# EAGLE board Schema (EAGLE 9.6.2)
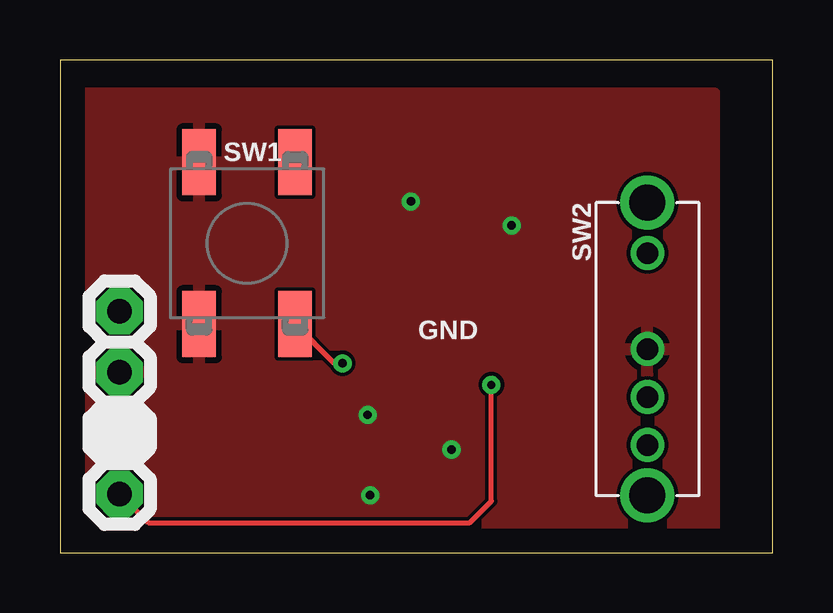
[diagram p0: board, top side]
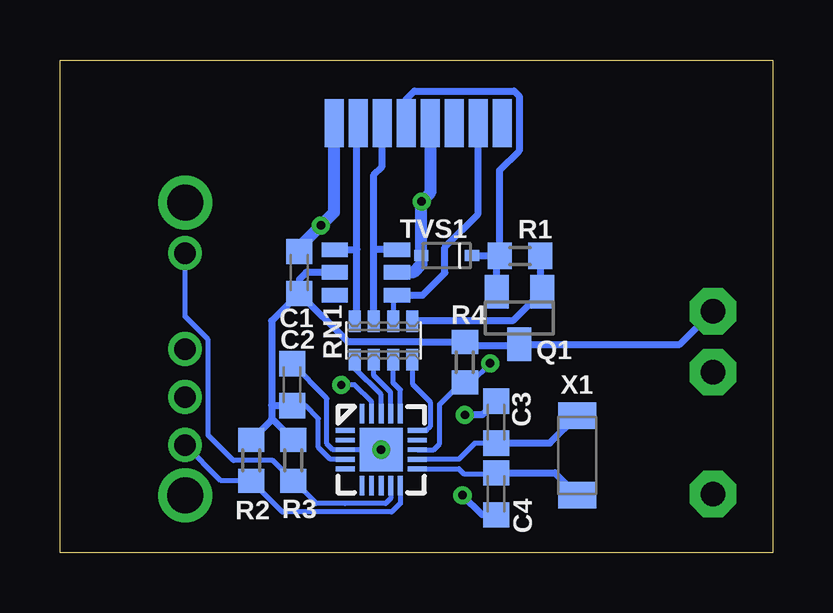
[diagram p1: board, bottom side, seen from below]

Size 29.69 x 20.55 mm. Coordinates in mm from the lower left corner, seen from the top.
Outline: 0,0 29.69,0 29.69,20.55 0,20.55 0,0
Copper layers (1*16): Top 0.035mm / dielectric 1.5mm / Bottom 0.035mm
Design rules "default *": minimum track width 6mil, minimum drill 0.35mm, track to track 6mil, track to pad 6mil, pad to pad 6mil, via to via 6mil, smd to smd 6mil, copper to edge 40mil, drill to drill 0mil, minimum pad ring 10mil, minimum via ring 8mil, stop-mask expansion 4mil, vias tented up to drill 15mil, thermal gap 10mil

## Footprints (pad centres in the part's own frame; a part is rotated, then mirrored left to right if it is on the bottom)
C0603K = smd 1.05 x 1.08: 1 -0.875,0; 2 0.875,0
SOT23 = smd 1 x 1.4: 1 -0.95,-1.1; 2 0.95,-1.1; 3 0,1.1
R0603 = smd 1 x 1.1: 1 -0.85,0; 2 0.85,0
CTS742C083 = smd 0.5 x 0.9: 1 -1.2,-0.8; 2 -0.4,-0.8; 3 0.4,-0.8; 4 1.2,-0.8; 5 1.2,0.8; 6 0.4,0.8; 7 -0.4,0.8; 8 -1.2,0.8
SWITCH-DTS = smd 2.75 x 1.4: T1 -3.375,2; T2 3.375,2; T3 -3.375,-2; T4 3.375,-2
OS103011MS8QP1 = drill 0.9: 1 -4,0; 2 0,0; 3 2,0; 4 4,0 | drill 1.5: A -6.1,0; B 6.1,0
SOD323 = smd 0.59 x 0.45: ANODE 1.055,0; CATHODE -1.055,0
SOD-23-6 = smd 1.1 x 0.6: 1 -1.3,0.95; 2 -1.3,0; 3 -1.3,-0.95; 4 1.3,-0.95; 5 1.3,0; 6 1.3,0.95
ATTINY1616-20VQFN = smd 0.8 x 0.2: 1 -1.5,0.8; 2 -1.5,0.4; 3 -1.5,0; 4 -1.5,-0.4; 5 -1.5,-0.8; 11 1.5,-0.8; 12 1.5,-0.4; 13 1.5,0; 14 1.5,0.4; 15 1.5,0.8 | smd 0.2 x 0.8: 6 -0.8,-1.5; 7 -0.4,-1.5; 8 0,-1.5; 9 0.4,-1.5; 10 0.8,-1.5; 16 0.8,1.5; 17 0.4,1.5; 18 0,1.5; 19 -0.4,1.5; 20 -0.8,1.5 | smd 1.8 x 1.8: TH 0,0
VEX-CONNECT = smd 0.8 x 2: COMP -0.5,0; CONNECT 2.5,0; ENABLE -1.5,0; GROUND.1 -3.5,0; GROUND.2 0.5,0; MODE -2.5,0; NC.1 1.5,0; NC.2 3.5,0
PROG = drill 1.016 pad 1.93 octagon: P$1 -1.27,0; P$2 -3.81,0; P$3 3.81,0
1206-UNI = smd 1.1 x 1.6: 1 -1.65,0; 2 1.65,0

## Placement (x,y rotation side)
C1  10uf  [C0603K]  19.72,11.69 90 bottom
C2  100nf  [C0603K]  20.02,7.01 90 bottom
C3  12pf  [C0603K]  11.52,5.45 90 bottom
C4  12pf  [C0603K]  11.52,2.46 270 bottom
Q1  BSS84  [SOT23]  10.55,9.79 180 bottom
R1  1M  [R0603]  10.52,12.38 0 bottom
R2  1M  [R0603]  21.72,3.85 90 bottom
R3  1M  [R0603]  19.97,3.85 90 bottom
R4  1M  [R0603]  12.82,7.95 90 bottom
RN1  220R  [CTS742C083]  16.21,8.85 180 bottom
SW1  SWITCH-DSTL61R-B  [SWITCH-DTS]  7.79,12.91 270 top
SW2  SWITCH-SP3T  [OS103011MS8QP1]  24.48,8.49 270 top
TVS1  D1213A-01WS-7  [SOD323]  13.58,12.39 180 bottom
TVS2  TPD4E001DBVR  [SOD-23-6]  16.94,11.69 180 bottom
U$1  ATTINY1616-MNR  [ATTINY1616-20VQFN]  16.31,4.3 0 bottom
U$4  VEX-CONNECT  [VEX-CONNECT]  14.77,17.92 0 bottom
U$5  PROG  [PROG]  2.48,6.26 270 top
X1  XTAL2-3X1.5  [1206-UNI]  8.14,4.06 270 bottom

## Library data of the parts
C1 = rcl; LCSC_PART: C19702; SPICEPREFIX: C
C2 = rcl; LCSC_PART: C14663; SPICEPREFIX: C
C3 C4 = rcl; LCSC_PART: C38523; SPICEPREFIX: C
Q1 = transistor-small-signal; LCSC_PART: C114481
R1-R4 = rcl; LCSC_PART: C22935; SPICEPREFIX: R
RN1 = resistor-net; LCSC_PART: C706474; OC_FARNELL: unknown; OC_NEWARK: unknown
SW1 SW2 U$4 U$5 = CompSwitchV1
TVS1 = CompSwitchV1; LCSC_PART: C496538
TVS2 = CompSwitchV1; LCSC_PART: C465736
U$1 = CompSwitchV1; LCSC_PART: C507118
X1 = CompSwitchV1; LCSC_PART: C93232

## Nets
GND: C1.2 C2.2 C3.2 C4.2 SW1.T3 SW1.T4 SW2.2 TVS1.ANODE TVS2.2 U$1.3 U$1.TH U$4.GROUND.1 U$4.GROUND.2 U$5.P$1
N$1: RN1.5 U$1.18
N$2: RN1.6 U$1.17
N$3: RN1.7 U$1.16
N$4: RN1.8 U$1.15
N$5: U$1.19 U$5.P$3
N$6: R2.1 SW2.4 U$1.10
N$7: RN1.2 TVS2.1 U$4.CONNECT
N$8: RN1.3 TVS2.3 U$4.ENABLE
N$9: RN1.4 TVS2.4 U$4.MODE
N$10: Q1.2 R1.1 TVS1.CATHODE U$4.COMP
N$12: R3.1 SW2.1 U$1.9
N$13: Q1.1 R1.2 RN1.1
N$16: R4.1 SW1.T2 U$1.13
N$18: C3.1 U$1.12 X1.1
N$19: C4.1 U$1.11 X1.2
VCC: C1.1 C2.1 Q1.3 R2.2 R3.2 R4.2 TVS2.5 U$1.4 U$5.P$2

## Tracks (layer width: path | path; a pad name or v marks a point on that pad's centre or on a via)
GND  (via drill 0.35)
  Bottom 0.2: U$1.TH U$1.3 18.32,4.3 18.57,4.55 18.57,6.43 C2.2
  Bottom 0.3: 14.64,14.63 v14.62,14.65 | C4.2 12.11,1.58 v12.92,2.4 | C3.2 12.09,5.75 v12.82,5.75
  Bottom 0.5: U$4.GROUND.1 18.27,14.2 v18.82,13.65 19.72,12.75 C1.2 | TVS2.2 14.98,11.69 14.64,12.04 TVS1.ANODE 14.64,14.63 | U$4.GROUND.2 14.27,15.01 v14.62,14.65
  other vias: 16.31,4.3
  pour Top: 1.07,19.15 1.07,1.05 27.27,1.05 27.27,19.15
N$1
  Bottom 0.2: U$1.18 16.31,6.59 17.41,7.69 RN1.5
N$2
  Bottom 0.2: U$1.17 15.91,6.69 16.61,7.39 RN1.6
N$3
  Bottom 0.2: U$1.16 15.51,6.79 15.81,7.09 RN1.7
N$4
  Bottom 0.2: RN1.8 15.01,7.04 14.27,6.3 14.27,5.25 14.42,5.1 U$1.15
N$5  (via drill 0.35)
  Top 0.2: U$5.P$3 3.68,1.25 17.07,1.25 17.97,2.15 v17.97,7
  Bottom 0.2: U$1.19 16.71,6.29 17.42,7 v17.97,7
N$6
  Bottom 0.2: U$1.10 15.51,2.06 15.87,1.7 20.42,1.7 R2.1 22.98,3 SW2.4
N$7
  Bottom 0.2: TVS2.1 15.81,10.57 RN1.2
  Bottom 0.3: TVS2.1 14.58,10.74 13.65,11.67 13.65,12.74 12.27,14.13 U$4.CONNECT
N$8
  Bottom 0.3: RN1.3 16.61,12.65 | 16.61,12.65 16.61,15.76 16.27,16.11 U$4.ENABLE | TVS2.3 16.6,12.64 16.61,12.65
N$9
  Bottom 0.3: RN1.4 17.41,9.91 17.32,10 17.32,12.65 | U$4.MODE 17.32,17.86 17.32,12.65 | TVS2.4 17.33,12.64 17.32,12.65
N$10
  Bottom 0.3: U$4.COMP 15.27,18.91 14.92,19.25 10.77,19.25 10.56,19.05 10.56,16.76 11.37,15.95 R1.1 | Q1.2 11.5,12.25 R1.1 | R1.1 TVS1.CATHODE
N$12
  Bottom 0.2: U$1.9 15.91,2.26 16.12,2.05 17.82,2.05 19.02,2.05 R3.1 20.82,3.85 22.47,3.85 23.52,4.9 23.52,8.89 24.48,9.85 SW2.1
N$13
  Bottom 0.3: RN1.1 14.97,9.69 10.8,9.69 Q1.1 9.67,10.96 R1.2
N$16  (via drill 0.35)
  Top 0.2: v11.77,7.9 11.43,7.9 SW1.T2
  Bottom 0.152: 12.96,7.1 R4.1 12.57,7.1
  Bottom 0.2: U$1.13 14.12,4.3 13.87,4.55 13.87,6.19 12.96,7.1 | 12.57,7.1 v11.77,7.9
N$18
  Bottom 0.2: C3.1 12.4,4.58 13.07,3.9 U$1.12
  Bottom 0.3: C3.1 9.27,4.58 X1.1
N$19
  Bottom 0.2: U$1.11 13.07,3.5 12.87,3.3 11.55,3.3 C4.1
  Bottom 0.3: C4.1 9.07,3.33 X1.2
VCC
  Bottom 0.2: U$1.4 18.42,3.9 18.92,4.4 18.92,5.6 19.45,6.13 C2.1
  Bottom 0.3: TVS2.5 19.43,11.69 19.72,11.4 C1.1 | U$5.P$2 3.86,8.69 Q1.3 10.6,8.64 12.66,8.64 R4.2 14.63,8.8 14.64,8.8 17.71,8.8 C1.1 | 20.87,6.15 20.87,5.6 | R3.2 20.87,5.6 | 20.87,5.6 20.87,5.55 R2.2 | 20.87,6.15 20.86,6.13 C2.1 | C1.1 20.87,9.66 20.87,6.15

## Text on the board
tNames: GND